# EAGLE board ard_card (EAGLE 5.09)
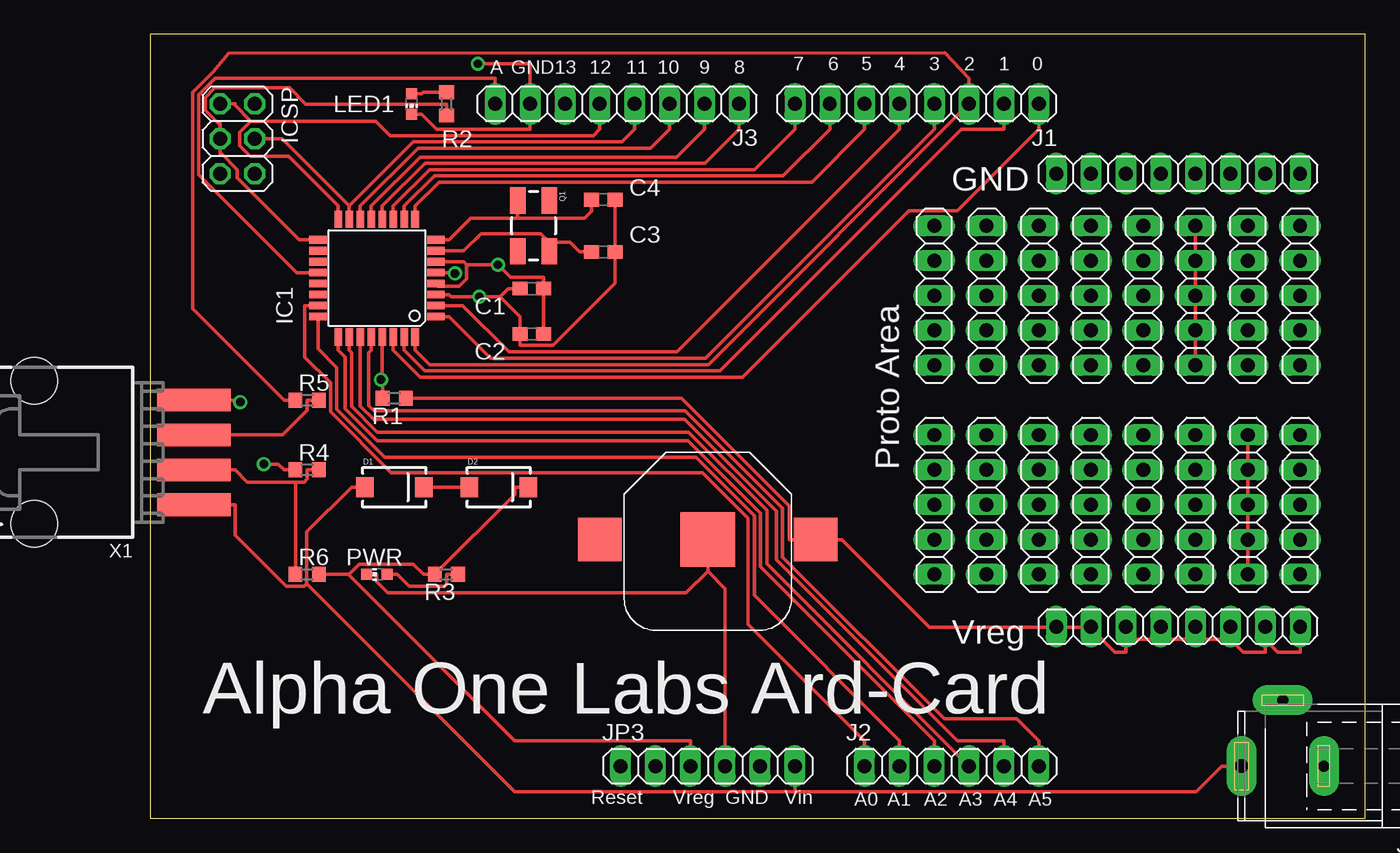
[diagram p0: board, top side]
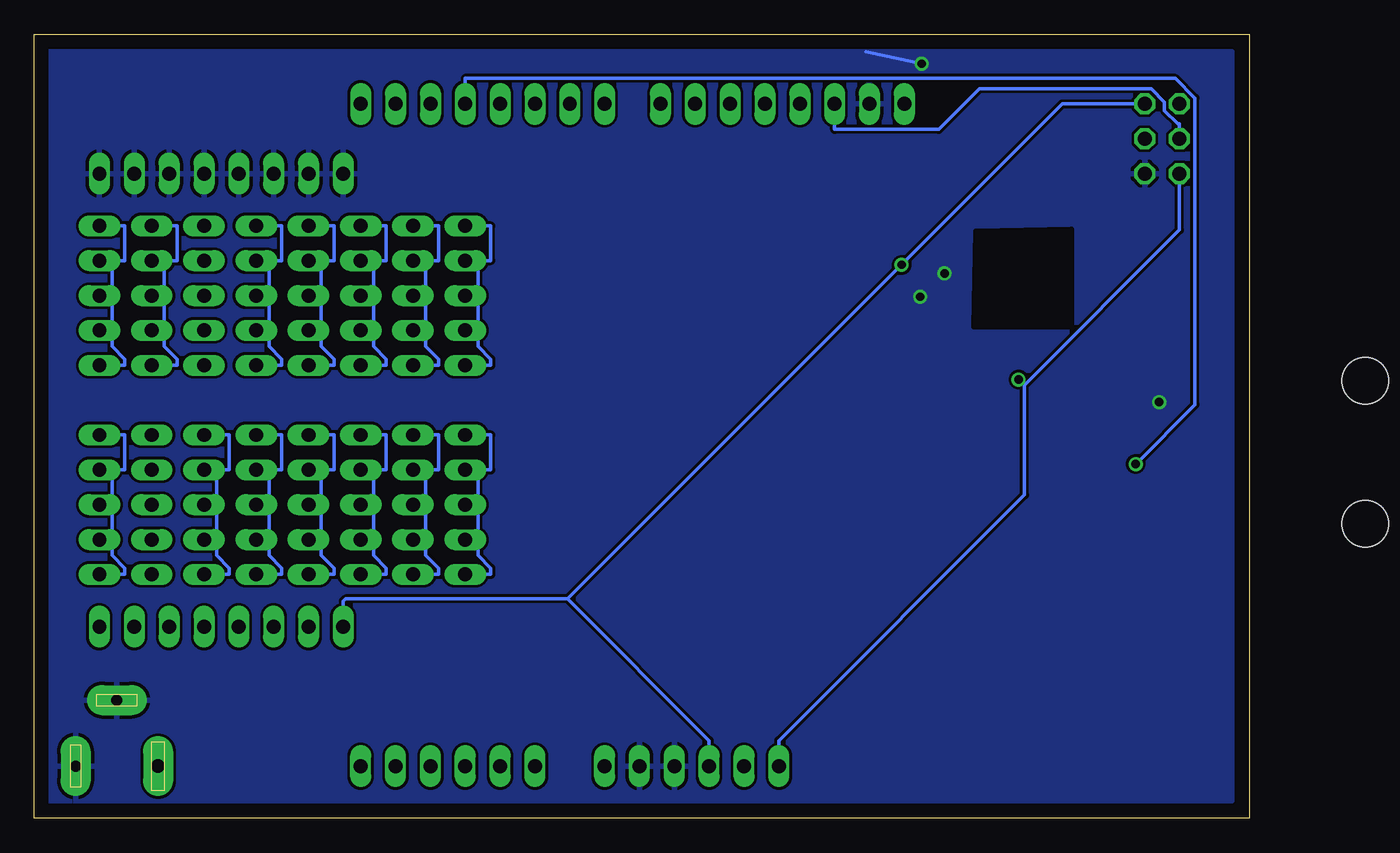
[diagram p1: board, bottom side, seen from below]

Size 88.57 x 57.14 mm. Coordinates in mm from the lower left corner, seen from the top.
Outline: 0,0 88.57,0 88.57,57.14 0,57.14 0,0
Copper layers (1*16): Top 0.035mm / dielectric 1.5mm / Bottom 0.035mm
Design rules "default": minimum track width 10mil, minimum drill 24mil, track to track 8mil, track to pad 8mil, pad to pad 8mil, via to via 8mil, smd to smd 8mil, copper to edge 40mil, drill to drill 8mil, minimum pad ring 10mil, minimum via ring 8mil, stop-mask expansion 4mil, vias tented up to drill 0mil, thermal gap 10mil
tKeepout: area 13,35.8 to 20.1,42.9
bKeepout: area 13,35.8 to 20.1,42.9
tRestrict: area 13,35.8 to 20.1,42.9
bRestrict: area 13,35.8 to 20.1,42.9
vRestrict: area 3.8,7.6 to 64.8,11.4

## Footprints (pad centres in the part's own frame; a part is rotated, then mirrored left to right if it is on the bottom)
BATTCON_12MM = smd 3.962 x 3.962: GND 0,0 | smd 3.175 x 3.175: PWR@1 -7.874,0; PWR@2 7.874,0
C0603 = smd 1.1 x 1: 1 -0.85,0; 2 0.85,0
SMA-DIODE = smd 1.27 x 1.47: A -2.15,0; C 2.15,0
TQFP32-08 = smd 1.27 x 0.559: 1 -4.293,2.8; 2 -4.293,2; 3 -4.293,1.2; 4 -4.293,0.4; 5 -4.293,-0.4; 6 -4.293,-1.2; 7 -4.293,-2; 8 -4.293,-2.8; 17 4.293,-2.8; 18 4.293,-2; 19 4.293,-1.2; 20 4.293,-0.4; 21 4.293,0.4; 22 4.293,1.2; 23 4.293,2; 24 4.293,2.8 | smd 0.559 x 1.27: 9 -2.8,-4.293; 10 -2,-4.293; 11 -1.2,-4.293; 12 -0.4,-4.293; 13 0.4,-4.293; 14 1.2,-4.293; 15 2,-4.293; 16 2.8,-4.293; 25 2.8,4.293; 26 2,4.293; 27 1.2,4.293; 28 0.4,4.293; 29 -0.4,4.293; 30 -1.2,4.293; 31 -2,4.293; 32 -2.8,4.293
2X03 = drill 1.016 octagon: 1 -2.54,-1.27; 2 -2.54,1.27; 3 0,-1.27; 4 0,1.27; 5 2.54,-1.27; 6 2.54,1.27
1X08 = drill 1.016 long: 1 -8.89,0; 2 -6.35,0; 3 -3.81,0; 4 -1.27,0; 5 1.27,0; 6 3.81,0; 7 6.35,0; 8 8.89,0
1X06 = drill 1.016 long: 1 -6.35,0; 2 -3.81,0; 3 -1.27,0; 4 1.27,0; 5 3.81,0; 6 6.35,0
SPC4078 = drill 0.8 pad 2.184 long: 1 -3,0; 2 0,-4.8 | drill 1 pad 2.184 long: 3 3,0
1X05 = drill 1.016 long: 1 -5.08,0; 2 -2.54,0; 3 0,0; 4 2.54,0; 5 5.08,0
CHIP-LED0603 = smd 0.8 x 0.8: A 0,-0.75; C 0,0.75
CRYSTAL-SMD-5X3 = smd 1.9 x 1.1: 1 -1.85,-1.15; 2 1.85,-1.15; 3 1.85,1.15; 4 -1.85,1.15
R0603 = smd 1 x 1.1: 1 -0.85,0; 2 0.85,0
15-91-04 = smd 1.651 x 5.334: 1 -3.81,-10.795; 2 -1.27,-10.795; 3 1.27,-10.795; 4 3.81,-10.795 | hole 3.404: -5.207,0.838; 5.207,0.838

## Placement (x,y rotation side)
BAT1  3v  [BATTCON_12MM]  40.64,20.32 180 top
C1  100nf  [C0603]  27.81,38.61 180 top
C2  100nf  [C0603]  27.81,35.31 180 top
C3  20pf  [C0603]  33.02,41.27 0 top
C4  20pf  [C0603]  33.02,45.09 0 top
D1  [SMA-DIODE]  17.78,24.13 0 top
D2  [SMA-DIODE]  25.4,24.13 0 top
IC1  MEGA48/88/168-AU  [TQFP32-08]  16.51,39.37 180 top
ICSP  [2X03]  6.35,49.53 270 top
J1  [1X08]  55.88,52.07 180 top
J2  [1X06]  58.42,3.81 0 top
J3  [1X08]  34.04,52.07 180 top
J4  [SPC4078]  82.55,3.81 180 top
JP1  [1X05]  57.15,38.1 90 top
JP2  [1X05]  60.96,38.1 90 top
JP3  [1X06]  40.64,3.81 0 top
JP4  [1X05]  64.77,38.1 90 top
JP5  [1X05]  68.58,38.1 90 top
JP6  [1X05]  72.39,38.1 90 top
JP7  [1X05]  76.2,38.1 90 top
JP8  [1X05]  80.01,38.1 90 top
JP9  [1X05]  83.82,38.1 90 top
JP10  [1X05]  57.15,22.86 90 top
JP11  [1X05]  64.77,22.86 90 top
JP12  [1X05]  60.96,22.86 90 top
JP13  [1X05]  68.58,22.86 90 top
JP14  [1X05]  72.39,22.86 90 top
JP15  [1X05]  76.2,22.86 90 top
JP16  [1X05]  80.01,22.86 90 top
JP17  [1X05]  83.82,22.86 90 top
JP18  [1X08]  74.93,13.97 180 top
JP19  [1X08]  74.93,46.99 180 top
LED1  [CHIP-LED0603]  19.05,52.07 180 top
PWR  [CHIP-LED0603]  16.51,17.78 90 top
Q1  16MHz  [CRYSTAL-SMD-5X3]  27.94,43.18 270 top
R1  10k  [R0603]  17.78,30.61 180 top
R2  1k  [R0603]  21.59,52.07 90 top
R3  1k  [R0603]  21.59,17.78 180 top
R4  68  [R0603]  11.43,25.4 0 top
R5  68  [R0603]  11.43,30.48 0 top
R6  1k  [R0603]  11.43,17.78 0 top
X1  C-GRID-04-15-91  [15-91-04]  -7.62,26.67 90 top

## Library data of the parts
BAT1 D1 D2 Q1 = SparkFun.1
C1-C4 R1-R6 = rcl
IC1 = avr-6
ICSP J1-J3 JP1-JP19 = pinhead
J4 = con-jack
LED1 PWR = led
X1 = con-molex

## Nets
AGND: IC1.21
AREF: IC1.20 J3.8
D+: IC1.32 J1.3 R5.1
D-: IC1.1 J1.4 R4.1
GND: BAT1.GND C1.2 C2.2 C3.2 C4.2 IC1.3 IC1.5 ICSP.6 J3.7 J4.1 J4.2 JP3.4 JP3.5 JP19.1 JP19.2 JP19.3 JP19.4 JP19.5 JP19.6 JP19.7 JP19.8 LED1.C PWR.C X1.4
MISO: IC1.16 ICSP.1 J3.5
MOSI: IC1.15 ICSP.4 J3.4
N$1: C3.1 IC1.7 Q1.3
N$2: C4.1 IC1.8 Q1.1
N$3: PWR.A R3.1
N$4: R5.2 X1.3
N$5: D1.C D2.A
N$6: LED1.A R2.2
N$7: IC1.23 J2.1
N$8: IC1.24 J2.2
N$9: IC1.25 J2.3
N$10: IC1.26 J2.4
N$11: IC1.27 J2.5
N$12: IC1.28 J2.6
N$13: IC1.30 J1.1
N$14: IC1.31 J1.2
N$15: R4.2 R6.1 X1.2
N$16: JP1.1 JP1.2 JP1.3 JP1.4 JP1.5
N$17: IC1.2 J1.5
N$18: IC1.9 J1.6
N$19: IC1.10 J1.7
N$20: IC1.11 J1.8
N$21: IC1.12 J3.1
N$22: IC1.13 J3.2
N$23: JP2.1 JP2.2 JP2.3 JP2.4 JP2.5
N$24: JP4.1 JP4.2 JP4.3 JP4.4 JP4.5
N$25: JP5.1 JP5.2 JP5.3 JP5.4 JP5.5
N$26: JP6.1 JP6.2 JP6.3 JP6.4 JP6.5
N$27: JP7.1 JP7.2 JP7.3 JP7.4 JP7.5
N$28: JP8.1 JP8.2 JP8.3 JP8.4 JP8.5
N$29: JP9.1 JP9.2 JP9.3 JP9.4 JP9.5
N$30: JP10.1 JP10.2 JP10.3 JP10.4 JP10.5
N$31: JP11.1 JP11.2 JP11.3 JP11.4 JP11.5
N$32: JP12.1 JP12.2 JP12.3 JP12.4 JP12.5
N$33: JP13.1 JP13.2 JP13.3 JP13.4 JP13.5
N$34: JP14.1 JP14.2 JP14.3 JP14.4 JP14.5
N$35: JP15.1 JP15.2 JP15.3 JP15.4 JP15.5
N$36: JP16.1 JP16.2 JP16.3 JP16.4 JP16.5
N$37: JP17.1 JP17.2 JP17.3 JP17.4 JP17.5
RESET: IC1.29 ICSP.5 JP3.1 R1.2
SCK: IC1.17 ICSP.3 J3.6 R2.1
SS: IC1.14 J3.3
V3.0: BAT1.PWR@1 C1.1 C2.1 D2.C IC1.4 IC1.6 ICSP.2 JP3.3 JP18.1 JP18.2 JP18.3 JP18.4 JP18.5 JP18.6 JP18.7 JP18.8 R1.1 R3.2 R6.2
VIN: D1.A J4.3 JP3.6 X1.1

## Tracks (layer width: path | path; a pad name or v marks a point on that pad's centre or on a via)
AREF
  Top 0.254: IC1.20 10.68,39.77 3.53,46.91 3.53,52.72 4.73,53.92 25.15,53.92 J3.8
D+
  Top 0.254: IC1.32 19.31,34.11 20.35,33.07 40.69,33.07 J1.3 59.69,52.25 59.69,53.92 57.93,55.81 5.71,55.75 4.57,54.41 3.07,52.91 3.07,37.16 9.75,30.48 R5.1
D-  (via drill 0.61 pad 1.02)
  Top 0.254: IC1.1 21.77,36.57 24.81,33.53 40.47,33.53 57.15,50.22 J1.4 | R4.1 9.75,25.4 9.33,25.82 v8.28,25.82
  Bottom 0.254: J1.4 57.15,53.92 5.39,53.92 3.95,52.48 3.95,30.15 v8.28,25.82
GND  (via drill 0.6 pad 1.02, 0.61 pad 1.02)
  Top 0.254: LED1.C 19.78,51.32 20.89,50.22 27.69,50.22 | 27.69,50.22 J3.7 | v22.2,39.71 22.15,39.77 21.77,39.77 IC1.5 | C4.2 C3.2 33.87,40.86 33.87,40.45 33.87,38.99 29.35,34.48 26.96,34.48 C2.2 26.96,36.55 25.49,38.02 | 25.49,38.02 26.08,38.61 C1.2 | 25.49,38.02 v23.99,38.02 21.92,38.02 21.77,38.17 IC1.3 | 40.64,18.01 41.91,16.74 JP3.4 | PWR.C 16.49,17.78 16.49,17.23 17.29,16.43 39.07,16.43 40.64,18.01 | 40.64,18.01 BAT1.GND | v6.56,30.34 6.32,30.34 6.17,30.48 X1.4 | 27.69,50.22 27.69,54.99 v23.88,54.99
  Bottom 0.254: v23.88,54.99 24,54.99 v23.88,54.99 | v23.88,54.99 27.94,55.88
  pour Bottom: 1.27,55.88 87.63,55.88 87.63,1.27 1.27,1.27
MISO
  Top 0.254: 7.33,50.8 6.17,51.96 6.17,52.07 ICSP.1 | 7.33,50.8 16.43,50.8 17.48,49.75 32.3,49.75 32.77,50.22 J3.5 | 7.33,50.8 6.52,49.99 6.52,49.03 7.29,48.26 10.08,48.26 13.71,44.63 IC1.16
MOSI
  Top 0.254: 14.51,44.63 19.18,49.29 34.38,49.29 35.31,50.22 J3.4 | 14.51,44.63 9.61,49.53 8.71,49.53 ICSP.4 | 14.51,44.63 IC1.15
N$1
  Top 0.254: 29.09,41.97 28.45,42.61 24.1,42.61 22.86,41.37 IC1.7 | 29.09,41.97 30.59,41.97 31.29,41.27 C3.1 | 29.09,41.97 Q1.3
N$2
  Top 0.254: C4.1 32.17,44.26 31.66,43.75 26.79,43.75 | 26.79,43.75 26.79,43.86 Q1.1 | IC1.8 21.77,42.17 23.35,43.75 26.79,43.75
N$3
  Top 0.254: PWR.A 17.99,17.78 18.87,16.9 21.46,16.9 21.61,17.05 21.61,17.78 R3.1
N$4
  Top 0.254: R5.2 11.45,30.48 11.45,29.75 9.64,27.94 X1.3
N$5
  Top 0.254: D1.C D2.A
N$6
  Top 0.254: LED1.A 19.78,52.82 19.88,52.92 R2.2
N$7
  Top 0.254: IC1.23 11.25,37.37 11.25,33.62 13.14,31.74 13.14,29.62 17.57,25.2 40.25,25.2 43.57,21.87 43.57,14.16 52.07,5.66 J2.1
N$8
  Top 0.254: IC1.24 12.22,34.22 13.6,32.84 13.6,29.82 17.1,26.31 39.78,26.31 44.03,22.06 44.03,16.24 | 44.03,16.24 | 44.03,16.24 54.61,5.66 J2.2
N$9
  Top 0.254: IC1.25 13.71,34.11 14.22,33.6 14.22,29.84 16.54,27.52 39.22,27.52 44.49,22.25 44.49,18.33 57.15,5.66 J2.3
N$10
  Top 0.254: J2.4 44.95,18.55 44.95,22.44 39.23,28.15 16.55,28.15 14.68,30.03 14.68,33.95 14.51,34.11 IC1.26
N$11
  Top 0.254: J2.5 62.23,5.66 58.82,5.66 45.64,18.85 45.64,22.39 38.96,29.07 16.28,29.07 15.31,30.04 IC1.27
N$12
  Top 0.254: IC1.28 16.11,34.11 15.92,33.92 15.92,30.08 16.31,29.69 38.99,29.69 46.09,22.59 46.09,19.04 57.89,7.25 63.18,7.25 64.77,5.66 J2.6
N$13
  Top 0.254: IC1.30 17.71,34.11 19.66,32.16 43.17,32.16 55.3,44.29 58.84,44.29 64.77,50.22 J1.1
N$14
  Top 0.254: IC1.31 18.51,34.11 20,32.62 41.53,32.62 59.13,50.22 62.23,50.22 J1.2
N$15
  Top 0.254: 10.58,24.5 7.07,24.5 6.17,25.4 X1.2 | 10.58,24.5 11.2,24.5 11.45,24.75 11.45,25.4 R4.2 | 10.58,24.5 10.58,18.66 R6.1
N$16
  Bottom 0.254: 56.22,40.64 55.3,40.64 55.3,43.18 JP1.5 | 56.22,40.64 JP1.4 | 56.22,38.1 56.22,40.64 | 56.22,38.1 JP1.3 | 56.22,35.56 56.22,38.1 | JP1.1 55.3,33.02 55.3,33.47 56.22,34.4 | 56.22,34.4 56.22,35.56 | 56.22,34.4 | 56.22,35.56 JP1.2
N$17
  Top 0.254: IC1.2 22.77,37.37 26.14,34 38.4,34 54.61,50.22 J1.5
N$18
  Top 0.254: J1.6 52.07,50.22 48.22,46.37 21.05,46.37 19.31,44.63 IC1.9
N$19
  Top 0.254: IC1.10 18.51,44.63 20.71,46.83 46.14,46.83 49.53,50.22 J1.7
N$20
  Top 0.254: IC1.11 17.71,44.63 20.36,47.28 44.06,47.28 46.99,50.22 J1.8
N$21
  Top 0.254: IC1.12 16.91,44.63 20.02,47.74 40.45,47.74 42.93,50.22 J3.1
N$22
  Top 0.254: IC1.13 16.11,44.63 19.68,48.2 38.37,48.2 40.39,50.22 J3.2
N$23
  Bottom 0.254: 60.03,40.64 59.11,40.64 59.11,43.18 JP2.5 | 60.03,40.64 JP2.4 | 60.03,38.1 60.03,40.64 | 60.03,38.1 JP2.3 | 60.03,35.56 60.03,38.1 | JP2.1 59.11,33.02 59.11,33.47 60.03,34.4 | 60.03,34.4 60.03,35.56 | 60.03,34.4 | 60.03,35.56 JP2.2
N$24
  Bottom 0.254: 63.84,40.64 62.92,40.64 62.92,43.18 JP4.5 | 63.84,40.64 JP4.4 | 63.84,38.1 63.84,40.64 | 63.84,38.1 JP4.3 | 63.84,35.56 63.84,38.1 | JP4.1 62.92,33.02 62.92,33.47 63.84,34.4 | 63.84,34.4 63.84,35.56 | 63.84,34.4 | 63.84,35.56 JP4.2
N$25
  Bottom 0.254: 67.65,40.64 66.73,40.64 66.73,43.18 JP5.5 | 67.65,40.64 JP5.4 | 67.65,38.1 67.65,40.64 | 67.65,38.1 JP5.3 | 67.65,35.56 67.65,38.1 | JP5.1 66.73,33.02 66.73,33.47 67.65,34.4 | 67.65,34.4 67.65,35.56 | 67.65,34.4 | 67.65,35.56 JP5.2
N$26
  Bottom 0.254: 71.46,40.64 70.54,40.64 70.54,43.18 JP6.5 | 71.46,40.64 JP6.4 | 71.46,38.1 71.46,40.64 | 71.46,38.1 JP6.3 | 71.46,35.56 71.46,38.1 | JP6.1 70.54,33.02 70.54,33.47 71.46,34.4 | 71.46,34.4 71.46,35.56 | 71.46,34.4 | 71.46,35.56 JP6.2
N$27
  Top 0.254: JP7.5 JP7.4 JP7.3 JP7.2 JP7.1
N$28
  Bottom 0.254: 79.08,40.64 78.16,40.64 78.16,43.18 JP8.5 | 79.08,40.64 JP8.4 | 79.08,38.1 79.08,40.64 | 79.08,38.1 JP8.3 | 79.08,35.56 79.08,38.1 | JP8.1 78.16,33.02 78.16,33.47 79.08,34.4 | 79.08,34.4 79.08,35.56 | 79.08,34.4 | 79.08,35.56 JP8.2
N$29
  Bottom 0.254: 82.89,40.64 81.97,40.64 81.97,43.18 JP9.5 | 82.89,40.64 JP9.4 | 82.89,38.1 82.89,40.64 | 82.89,38.1 JP9.3 | 82.89,35.56 82.89,38.1 | JP9.1 81.97,33.02 81.97,33.47 82.89,34.4 | 82.89,34.4 82.89,35.56 | 82.89,34.4 | 82.89,35.56 JP9.2
N$30
  Bottom 0.254: 56.22,25.4 55.3,25.4 55.3,27.94 JP10.5 | 56.22,25.4 JP10.4 | 56.22,22.86 56.22,25.4 | 56.22,22.86 JP10.3 | 56.22,20.32 56.22,22.86 | JP10.1 55.3,17.78 55.3,18.23 56.22,19.16 | 56.22,19.16 56.22,20.32 | 56.22,19.16 | 56.22,20.32 JP10.2
N$31
  Bottom 0.254: 63.84,25.4 62.92,25.4 62.92,27.94 JP11.5 | 63.84,25.4 JP11.4 | 63.84,22.86 63.84,25.4 | 63.84,22.86 JP11.3 | 63.84,20.32 63.84,22.86 | JP11.1 62.92,17.78 62.92,18.23 63.84,19.16 | 63.84,19.16 63.84,20.32 | 63.84,19.16 | 63.84,20.32 JP11.2
N$32
  Bottom 0.254: 60.03,25.4 59.11,25.4 59.11,27.94 JP12.5 | 60.03,25.4 JP12.4 | 60.03,22.86 60.03,25.4 | 60.03,22.86 JP12.3 | 60.03,20.32 60.03,22.86 | JP12.1 59.11,17.78 59.11,18.23 60.03,19.16 | 60.03,19.16 60.03,20.32 | 60.03,19.16 | 60.03,20.32 JP12.2
N$33
  Bottom 0.254: 67.65,25.4 66.73,25.4 66.73,27.94 JP13.5 | 67.65,25.4 JP13.4 | 67.65,22.86 67.65,25.4 | 67.65,22.86 JP13.3 | 67.65,20.32 67.65,22.86 | JP13.1 66.73,17.78 66.73,18.23 67.65,19.16 | 67.65,19.16 67.65,20.32 | 67.65,19.16 | 67.65,20.32 JP13.2
N$34
  Bottom 0.254: 71.46,25.4 70.54,25.4 70.54,27.94 JP14.5 | 71.46,25.4 JP14.4 | 71.46,22.86 71.46,25.4 | 71.46,22.86 JP14.3 | 71.46,20.32 71.46,22.86 | JP14.1 70.54,17.78 70.54,18.23 71.46,19.16 | 71.46,19.16 71.46,20.32 | 71.46,19.16 | 71.46,20.32 JP14.2
N$35
  Bottom 0.254: 75.27,25.4 74.35,25.4 74.35,27.94 JP15.5 | 75.27,25.4 JP15.4 | 75.27,22.86 75.27,25.4 | 75.27,22.86 JP15.3 | 75.27,20.32 75.27,22.86 | JP15.1 74.35,17.78 74.35,18.23 75.27,19.16 | 75.27,19.16 75.27,20.32 | 75.27,19.16 | 75.27,20.32 JP15.2
N$36
  Top 0.254: JP16.5 JP16.4 JP16.3 JP16.2 JP16.1
N$37
  Bottom 0.254: 82.89,25.4 81.97,25.4 81.97,27.94 JP17.5 | 82.89,25.4 JP17.4 | 82.89,22.86 82.89,25.4 | 82.89,22.86 JP17.3 | 82.89,20.32 82.89,22.86 | JP17.1 81.97,17.78 81.97,18.23 82.89,19.16 | 82.89,19.16 82.89,20.32 | 82.89,19.16 | 82.89,20.32 JP17.2
RESET  (via drill 0.61 pad 1.02)
  Top 0.254: 16.91,31.97 16.93,31.95 16.93,31.49 R1.2 | v16.82,31.97 16.91,31.97 | 16.91,31.97 16.91,34.11 IC1.29
  Bottom 0.254: 16.39,31.58 16.78,31.97 v16.82,31.97 | 16.39,31.58 16.39,23.57 34.29,5.66 JP3.1 | 16.39,31.58 5.08,42.88 ICSP.5
SCK
  Top 0.254: R2.1 21.59,52.05 11.34,52.05 10.16,53.23 4.69,53.23 3.99,52.53 3.99,51.62 4.98,50.62 5.08,50.62 ICSP.3 5.08,48.44 5.19,48.44 6.35,47.28 6.35,46.68 10.86,42.17 11.25,42.17 IC1.17
  Bottom 0.254: J3.6 30.23,50.22 22.64,50.22 19.68,53.17 7.15,53.17 6.17,52.2 6.17,51.58 5.22,50.62 5.08,50.62 ICSP.3
SS
  Top 0.254: IC1.14 15.31,44.63 19.52,48.84 36.47,48.84 37.85,50.22 J3.3
V3.0  (via drill 0.61 pad 1.02)
  Top 0.254: 14.47,17.76 26.56,5.66 39.37,5.66 JP3.3 | R1.1 38.72,30.61 46.6,22.73 46.6,20.32 BAT1.PWR@1 50.43,20.32 56.81,13.94 66.04,13.94 | 23.06,40.34 23.06,39.34 22.5,38.78 20.99,38.78 IC1.4 | IC1.6 22.83,40.57 23.06,40.34 | 23.06,40.34 v25.35,40.34 26.25,39.44 28.66,39.44 C1.1 C2.1 | D2.C 26.59,24.13 26.59,23.62 R3.2 19.91,17.78 19.17,18.52 15.22,18.52 14.47,17.76 | 14.47,17.76 14.45,17.78 13.11,17.78 R6.2 | 66.04,13.94 66.04,13.91 68.58,13.91 | JP18.8 66.04,13.94 | 68.58,13.91 68.58,13.85 70.32,12.12 71.12,12.12 71.12,13.04 | 68.58,13.91 JP18.7 | 71.12,13.04 JP18.6 | 71.12,13.04 73.66,13.04 | 73.66,13.04 JP18.5 | 73.66,13.04 76.2,13.04 | 76.2,13.04 JP18.4 | 76.2,13.04 78.74,13.04 | JP18.1 83.82,12.12 82.21,12.12 81.28,13.04 | 81.28,13.04 81.28,12.12 79.67,12.12 78.74,13.04 | 81.28,13.04 JP18.2 | 78.74,13.04 JP18.3
  Bottom 0.254: 49.7,15.99 65.87,15.99 66.04,15.82 JP18.8 | 49.7,15.99 39.37,5.66 JP3.3 | 49.7,15.99 v25.35,40.34 13.62,52.07 ICSP.2
VIN
  Top 0.254: J4.3 78.13,3.81 76.27,1.96 46.99,1.96 | 11.41,17.09 26.55,1.96 46.99,1.96 | 11.41,17.09 11.41,20.88 14.66,24.13 D1.A | 11.41,17.09 11.22,16.9 9.92,16.9 6.17,20.64 6.17,22.86 X1.1 | 46.99,1.96 JP3.6

## Text on the board
tNames: A | GND | 13 | 12 | 11 | 10 | 9 | 8 | 7 | 6 | 5 | 4 | 3 | 2 | 1 | 0 | GND | Proto Area | Vreg | Alpha One Labs Ard-Card | Reset | Vreg | GND | Vin | A0 | A1 | A2 | A3 | A4 | A5